# EAGLE board wheelwriter (EAGLE 7.6.0)
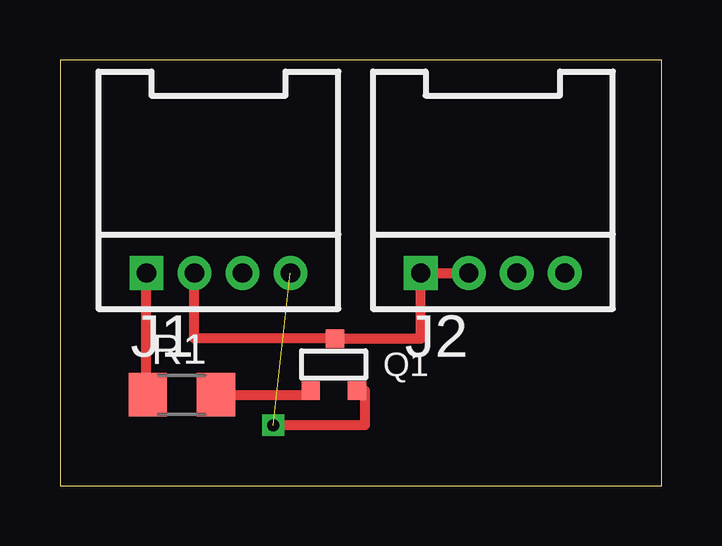
[diagram p0: board, top side]
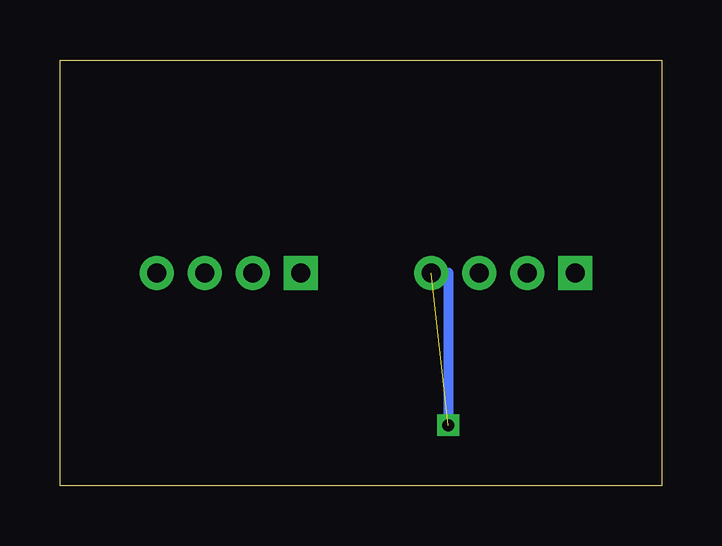
[diagram p1: board, bottom side, seen from below]

Size 25.07 x 17.77 mm. Coordinates in mm from the lower left corner, seen from the top.
Outline: 0,0 25.07,0 25.07,17.77 0,17.77 0,0
Copper layers (1*16): Top 0.035mm / dielectric 1.5mm / Bottom 0.035mm
Design rules "default *": minimum track width 10mil, minimum drill 24mil, track to track 8mil, track to pad 8mil, pad to pad 8mil, via to via 8mil, smd to smd 8mil, copper to edge 40mil, drill to drill 8mil, minimum pad ring 12mil, minimum via ring 8mil, stop-mask expansion 4mil, vias tented up to drill 0mil, thermal gap 10mil

## Footprints (pad centres in the part's own frame; a part is rotated, then mirrored left to right if it is on the bottom)
4P-2.0-90D = drill 0.8 pad 1.27 square: 1 -3,0 | drill 0.8 pad 1.27: 2 -1,0; 3 1,0; 4 3,0
SOT-23 = smd 0.762 x 0.762: 1 -0.979,-1.101; 2 0.94,-1.101; 3 0.025,1.067
R1206 = smd 1.6 x 1.803: 1 -1.422,0; 2 1.422,0

## Placement (x,y rotation side)
J1  [4P-2.0-90D]  6.6,8.89 0 top
J2  [4P-2.0-90D]  18.03,8.89 0 top
Q1  [SOT-23]  11.43,5.08 0 top
R1  1K  [R1206]  5.08,3.81 0 top

## Library data of the parts
J1 J2 = Connector_grove
Q1 = transistors
R1 = resistor

## Nets
+5V: J2.3
GND: J1.4 J2.4 Q1.2
N$1: Q1.1 R1.2
N$4: J1.1 R1.1
PIN2/BUS: J1.2 J2.1 J2.2 Q1.3

## Tracks (layer width: path | path; a pad name or v marks a point on that pad's centre or on a via)
GND  (2 unrouted)
  Top 0.406: Q1.2 12.7,3.98 12.7,2.54 8.89,2.54
  Bottom 0.406: J1.4 8.89,8.89 8.89,2.54
N$1
  Top 0.406: R1.2 10.45,3.81 Q1.1
N$2  (1 unrouted)
N$4
  Top 0.406: R1.1 3.6,3.81 J1.1
N$5  (via drill 0.5 pad 0.3)
  other vias: 8.89,2.54
PIN2/BUS
  Top 0.406: J1.2 5.6,6.15 Q1.3 15.03,6.15 J2.1 J2.2